# Altium PCB F407ZGT6.PcbDoc (part 6 of 7)
Units mil, origin at the board's own origin, x right, y up, seen from the top; angles counter-clockwise.
Board outline 4380 x 3940 mil, 2 copper layers (Top Layer, Bottom Layer); 88 components, 146 nets, 552 pads, 268 vias.
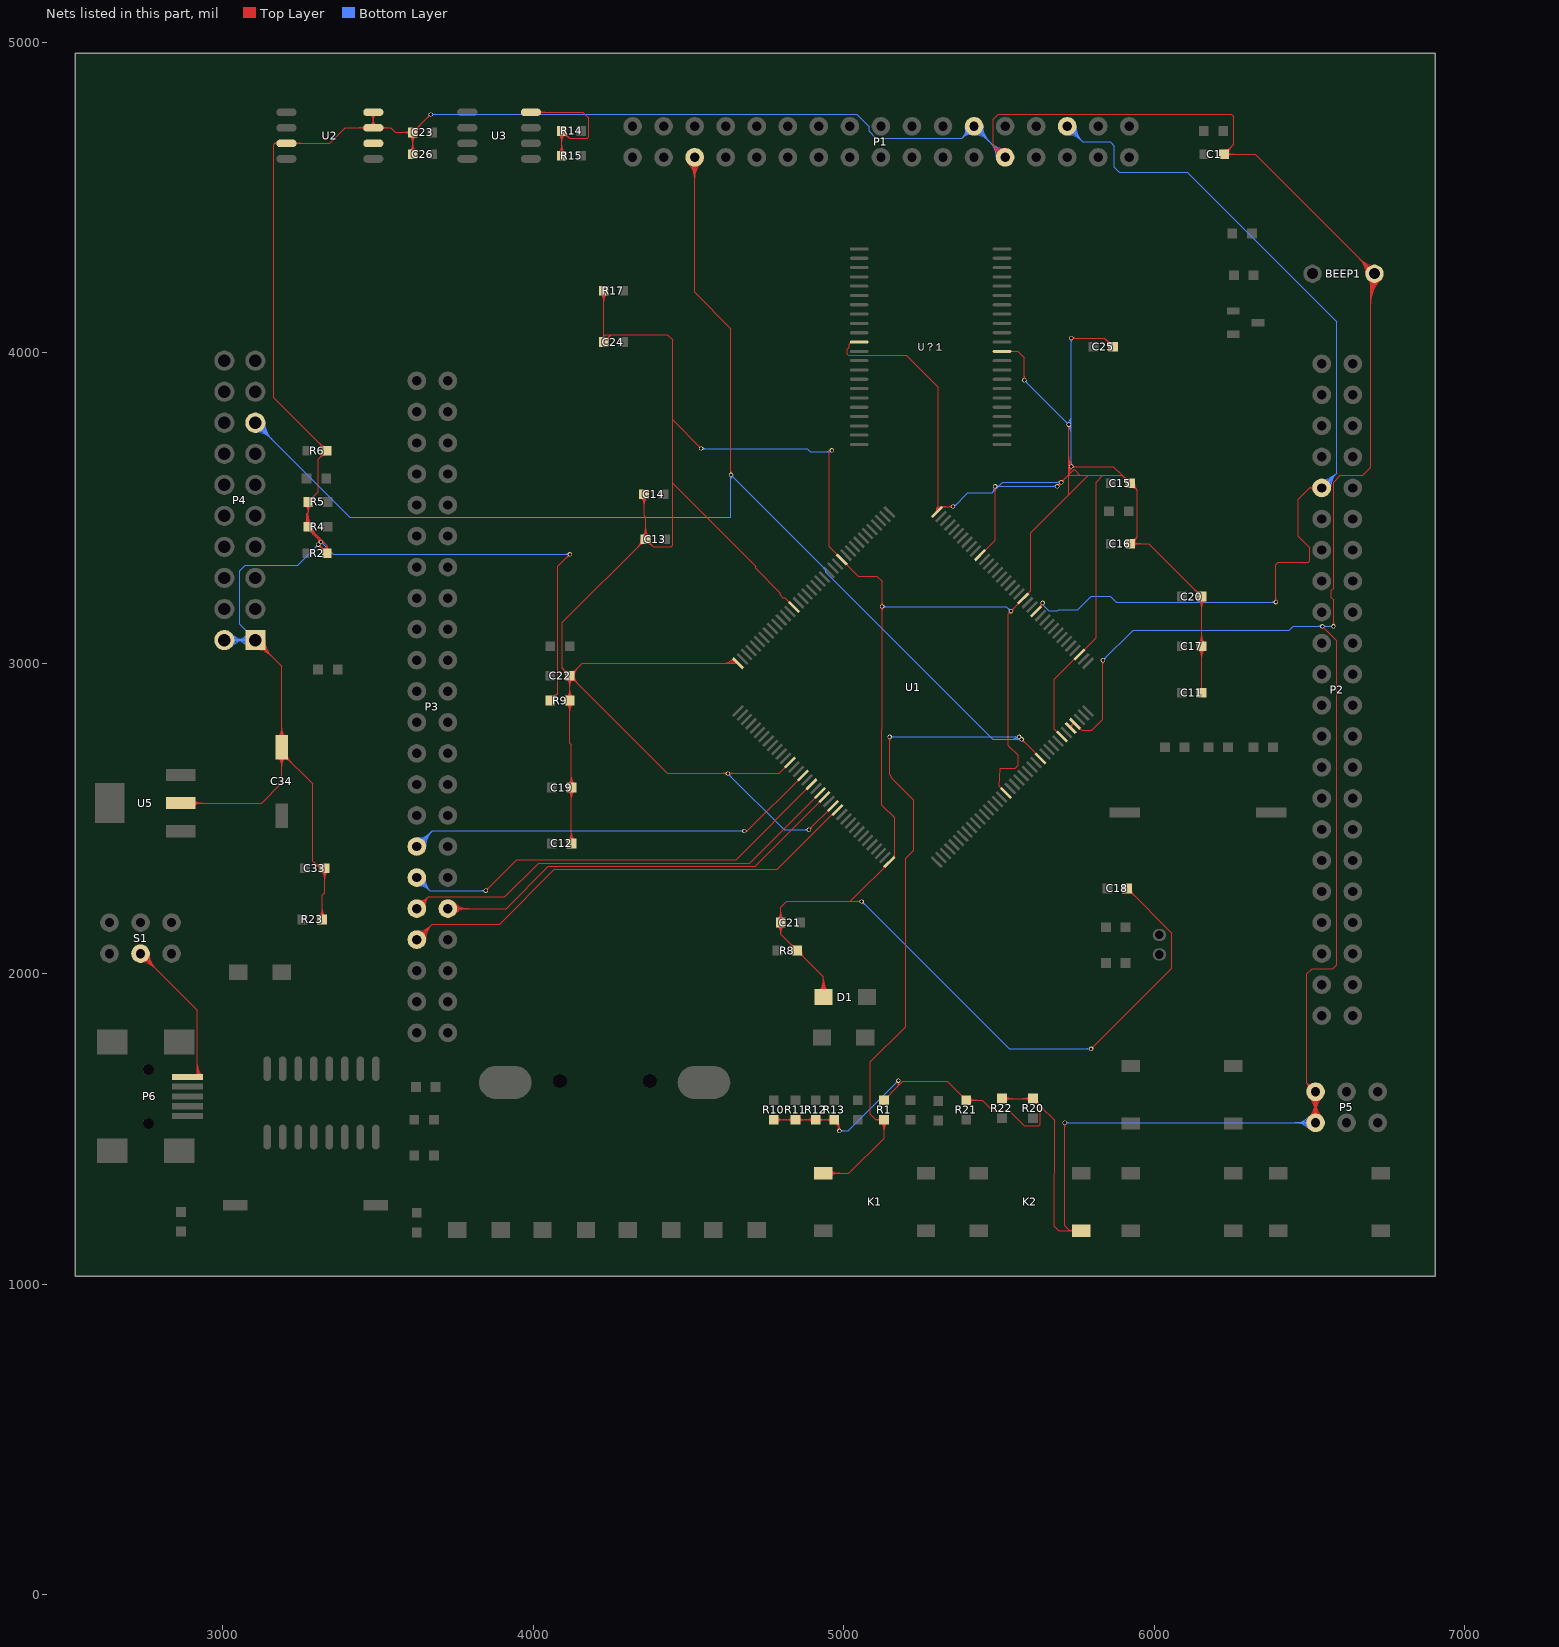
[diagram p6: the nets of this part, all layers, seen from the top]

## Via types
v1: diameter 14, hole 10, Top Layer to Bottom Layer, 265 vias
v2: diameter 150, hole 150, Top Layer to Bottom Layer, 3 vias

## Nets (pads, with @x,y where several pads share a name; then routed paths per layer and width w, separated by ;. In a path a pad name is that pad's centre, name@x,y a point inside that pad or via, vN(x,y) a via of type N, cw(c..) or ccw(c..) an arc to the next point about the centre after c; other vN are vias at no path point) (continued)
PF11: P1.30 P2.36 U1.49 | length 3898.1
  Top Layer w4: U1.49@5620.15,3167.33 5641,3188.18 v1(5641,3195) ; U1.49@5627.64,3174.82 ccw(c5607.46,3195) v1@5636,3195 ; U1.49@5633.79,3183.3 ccw(c5633.79,3188.92) 5637.77,3184.95 ccw(c5641.74,3180.97) U1.49@5636.12,3180.97 ; U1.49@5634.47,3181.65 ccw(c5621.12,3195) v1@5640,3195 ; v1@6388.46,3200.54 ccw(c6379.93,3209.07) 6392,3209.07 ccw(c6404.07,3209.07) v1@6395.54,3200.54 ; v1(6392,3197) 6392,3317 6400,3325 6496,3325 6502,3331 6502,3372 6465,3409 6465,3528 6502,3565 ; P2.36@6513.26,3556.71 ccw(c6502,3553.22) 6502,3565 ; P2.36@6513.26,3573.29 cw(c6502,3576.78) 6502,3565 ; P2.36@6517.08,3557.89 ccw(c6507.43,3554.9) 6507.43,3565 ccw(c6507.43,3575.1) P2.36@6517.08,3572.11 ; P2.36@6540,3565 6502,3565
  Bottom Layer w4: v1(5641,3195) 5641,3189 5661,3169 5690,3169 5693,3172 5754.23,3172 5798.23,3216 5859,3216 5878,3197 v1(6392,3197) ; P1.30@5720,4702 cw(c5720,4634.4) 5767.8,4682.2 cw(c5815.6,4730) P1.30@5748,4730 ; P1.30@5720,4706 cw(c5720,4648.06) 5760.97,4689.03 cw(c5801.94,4730) P1.30@5744,4730 ; P1.30@5720,4710 cw(c5720,4661.72) 5754.14,4695.86 cw(c5788.28,4730) P1.30@5740,4730 ; P1.30@5720,4714 cw(c5720,4675.37) 5747.31,4702.69 cw(c5774.63,4730) P1.30@5736,4730 ; P1.30@5720,4730 5770,4680 5858,4680 5872,4666 5872,4598 5888,4582 6106,4582 6588,4100 6588,3613 P2.36@6540,3565 ; v1@6388.46,3193.46 ccw(c6379.93,3184.93) 6379.93,3197 ccw(c6379.93,3209.07) v1@6388.46,3200.54 ; P2.36@6540,3581 ccw(c6540,3619.63) 6567.31,3592.31 ccw(c6594.63,3565) P2.36@6556,3565 ; P2.36@6540,3585 ccw(c6540,3633.28) 6574.14,3599.14 ccw(c6608.28,3565) P2.36@6560,3565 ; P2.36@6540,3589 ccw(c6540,3646.94) 6580.97,3605.97 ccw(c6621.94,3565) P2.36@6564,3565 ; P2.36@6540,3593 ccw(c6540,3660.6) 6587.8,3612.8 ccw(c6635.6,3565) P2.36@6568,3565
PG9: P3.14 U1.124 | length 1713.8
  Top Layer w4: v1(4680,2460) 4690.11,2460 ; v1@4683.97,2456.97 cw(c4690.11,2452.28) 4690.11,2460 ; v1@4683.97,2463.03 ccw(c4690.11,2467.72) 4690.11,2460 ; U1.124@4852.53,2624.75 cw(c4846.9,2624.75) 4850.88,2620.77 cw(c4854.86,2616.79) U1.124@4854.86,2622.42 ; U1.124@4868.5,2638.39 4690.11,2460
  Bottom Layer w4: P3.14@3625,2410 3675,2460 v1(4680,2460) ; P3.14@3625,2426 ccw(c3625,2464.63) 3652.31,2437.31 ccw(c3679.63,2410) P3.14@3641,2410 ; P3.14@3625,2430 ccw(c3625,2478.28) 3659.14,2444.14 ccw(c3693.28,2410) P3.14@3645,2410 ; P3.14@3625,2434 ccw(c3625,2491.94) 3665.97,2450.97 ccw(c3706.94,2410) P3.14@3649,2410 ; P3.14@3625,2438 ccw(c3625,2505.6) 3672.8,2457.8 ccw(c3720.6,2410) P3.14@3653,2410 ; v1@4676.46,2456.46 ccw(c4667.93,2447.93) 4667.93,2460 ccw(c4667.93,2472.07) v1@4676.46,2463.54
PG11: P3.12 U1.126 | length 1748.7
  Top Layer w4: v1(3847,2268) 3947,2368 4653.79,2368 U1.126@4896.34,2610.55 ; v1@3847,2273 ccw(c3847,2285.07) 3855.54,2276.54 ccw(c3864.07,2268) v1@3852,2268 ; U1.126@4880.37,2596.91 cw(c4874.74,2596.91) 4878.72,2592.93 cw(c4882.7,2588.95) U1.126@4882.7,2594.58
  Bottom Layer w4: P3.12@3625,2310 3667,2268 ; P3.12@3626.53,2294.07 cw(c3629.2,2266.2) 3649,2286 cw(c3668.8,2305.8) P3.12@3640.93,2308.47 ; P3.12@3626.91,2290.09 cw(c3630.25,2255.26) 3655,2280 cw(c3679.74,2304.75) P3.12@3644.91,2308.09 ; P3.12@3627.29,2286.11 cw(c3631.3,2244.31) 3661,2274 cw(c3690.69,2303.7) P3.12@3648.89,2307.71 ; P3.12@3627.67,2282.13 cw(c3632.35,2233.36) 3667,2268 ; P3.12@3652.87,2307.33 ccw(c3701.64,2302.65) 3667,2268 ; v1@3843.46,2264.46 ccw(c3834.93,2255.93) 3834.93,2268 ccw(c3834.93,2280.07) v1@3843.46,2271.54 ; v1(3847,2268) 3667,2268
PG13: P3.10 U1.128 | length 1673.6
  Top Layer w4: P3.10@3625,2210 3663,2248 ; P3.10@3627.79,2225.75 ccw(c3631.53,2246.89) 3646.71,2231.71 ccw(c3661.89,2216.53) P3.10@3640.75,2212.79 ; P3.10@3628.49,2229.69 ccw(c3633.17,2256.12) 3652.14,2237.14 ccw(c3671.12,2218.17) P3.10@3644.69,2213.49 ; P3.10@3629.19,2233.63 ccw(c3634.8,2265.34) 3657.57,2242.57 ccw(c3680.34,2219.8) P3.10@3648.63,2214.19 ; P3.10@3629.88,2237.57 ccw(c3636.43,2274.56) 3663,2248 ; P3.10@3652.57,2214.88 cw(c3689.56,2221.43) 3663,2248 ; 4905.76,2564.76 cw(c4910.53,2559.99) U1.128@4910.53,2566.74 ; 4906.89,2565.89 ccw(c4903.7,2569.07) U1.128@4908.2,2569.07 ; U1.128@4913,2572 4697,2356 4017,2356 3909,2248 3663,2248
PG14: P3.9 U1.129 | length 1704.3
  Top Layer w4: P3.9@3725,2210 3913,2210 4049,2346 4715.3,2346 U1.129@4938.1,2568.79 ; P3.9@3736.31,2198.69 cw(c3763.63,2171.37) 3763.63,2210 cw(c3763.63,2248.63) P3.9@3736.31,2221.31 ; P3.9@3739.14,2195.86 cw(c3773.28,2161.72) 3773.28,2210 cw(c3773.28,2258.28) P3.9@3739.14,2224.14 ; P3.9@3741.97,2193.03 cw(c3782.94,2152.06) 3782.94,2210 cw(c3782.94,2267.94) P3.9@3741.97,2226.97 ; P3.9@3744.8,2190.2 cw(c3792.6,2142.4) 3792.6,2210 cw(c3792.6,2277.6) P3.9@3744.8,2229.8 ; U1.129@4922.12,2555.15 cw(c4916.5,2555.15) 4920.48,2551.17 cw(c4924.45,2547.19) U1.129@4924.45,2552.82
PG15: P3.8 U1.132 | length 1872.3
  Top Layer w4: P3.8@3625,2110 3675,2160 3892,2160 4068,2336 4786,2336 4975,2525 4979.85,2525 U1.132@4979.85,2527.03 ; P3.8@3625,2126 ccw(c3625,2164.63) 3652.31,2137.31 ccw(c3679.63,2110) P3.8@3641,2110 ; P3.8@3625,2130 ccw(c3625,2178.28) 3659.14,2144.14 ccw(c3693.28,2110) P3.8@3645,2110 ; P3.8@3625,2134 ccw(c3625,2191.94) 3665.97,2150.97 ccw(c3706.94,2110) P3.8@3649,2110 ; P3.8@3625,2138 ccw(c3625,2205.6) 3672.8,2157.8 ccw(c3720.6,2110) P3.8@3653,2110 ; 4957.42,2507.42 cw(c4966.21,2498.62) U1.132@4966.21,2511.06
RESET: K1.1 P1.5 P4.15 R1.1 U1.25 | length 7668.9
  Top Layer w4: P1.5@4500.2,4610.2 cw(c4452.4,4562.4) 4520,4562.4 cw(c4587.6,4562.4) P1.5@4539.8,4610.2 ; P1.5@4503.03,4613.03 cw(c4462.06,4572.06) 4520,4572.06 cw(c4577.94,4572.06) P1.5@4536.97,4613.03 ; P1.5@4505.86,4615.86 cw(c4471.72,4581.72) 4520,4581.72 cw(c4568.28,4581.72) P1.5@4534.14,4615.86 ; P1.5@4508.69,4618.69 cw(c4481.37,4591.37) 4520,4591.37 cw(c4558.63,4591.37) P1.5@4531.31,4618.69 ; P1.5@4520,4630 4520,4195 4637,4078 v1(4637,3607) ; v1@4633.46,3610.54 ccw(c4624.93,3619.07) 4637,3619.07 ccw(c4649.07,3619.07) v1@4640.54,3610.54 ; K1.1@4934.65,1357.52 5016.52,1357.52 5130,1471 R1.1@5130,1530 5104,1530 ; K1.1@4951.34,1350.67 cw(c4967.87,1334.14) 4967.87,1357.52 cw(c4967.87,1380.9) K1.1@4951.34,1364.37 ; K1.1@4954.17,1347.84 cw(c4977.53,1324.48) 4977.53,1357.52 cw(c4977.53,1390.56) K1.1@4954.17,1367.2 ; K1.1@4956.99,1345.01 cw(c4987.18,1314.82) 4987.18,1357.52 cw(c4987.18,1400.22) K1.1@4956.99,1370.03 ; R1.1@5118.64,1522.26 ccw(c5104,1512.29) 5104,1530 ; R1.1@5118.64,1537.74 cw(c5104,1547.71) 5104,1530 ; R1.1@5120.28,1520.28 cw(c5096.81,1496.81) 5130,1496.81 cw(c5163.19,1496.81) R1.1@5139.72,1520.28 ; R1.1@5121.94,1524.51 ccw(c5111.57,1517.44) 5111.57,1530 ccw(c5111.57,1542.56) R1.1@5121.94,1535.49 ; R1.1@5123.11,1523.11 cw(c5106.47,1506.47) 5130,1506.47 cw(c5153.53,1506.47) R1.1@5136.89,1523.11 ; v1@5144.46,2759.46 cw(c5135.93,2750.93) 5148,2750.93 cw(c5160.07,2750.93) v1@5151.54,2759.46 ; v1(5148,2763) 5148,2640.36 5153,2635.36 5153,2632.05 5226,2559.05 5226,2397.67 5200,2371.67 5200,1830 5086,1716 5086,1548 5104,1530 ; v1@5565.37,2758.01 cw(c5565.85,2747.72) v1(5573.13,2755) ; v1@5568.14,2755.23 ccw(c5557.85,2755.72) v1(5565.13,2763) ; v1@5570.13,2762.77 ccw(c5580.41,2762.28) v1(5573.13,2755) ; v1@5572.9,2759.99 cw(c5572.41,2770.28) v1(5565.13,2763) ; v1@5573.13,2750 cw(c5573.13,2737.93) 5581.67,2746.46 cw(c5590.2,2755) v1@5578.13,2755 ; U1.25@5618.09,2707.71 ccw(c5612.47,2707.71) 5616.45,2711.69 ccw(c5620.43,2715.66) U1.25@5620.43,2710.04 ; U1.25@5634.07,2694.07 v1(5573.13,2755) ; v1(5565.13,2763) v1(5573.13,2755)
  Bottom Layer w4: P4.15@3105,3744.5 cw(c3105,3670.87) 3157.07,3722.93 cw(c3209.13,3775) P4.15@3135.5,3775 ; P4.15@3105,3748.5 cw(c3105,3684.52) 3150.24,3729.76 cw(c3195.48,3775) P4.15@3131.5,3775 ; P4.15@3105,3752.5 cw(c3105,3698.18) 3143.41,3736.59 cw(c3181.82,3775) P4.15@3127.5,3775 ; P4.15@3105,3756.5 cw(c3105,3711.84) 3136.58,3743.42 cw(c3168.16,3775) P4.15@3123.5,3775 ; P4.15@3105,3760.5 cw(c3105,3725.49) 3129.75,3750.25 cw(c3154.51,3775) P4.15@3119.5,3775 ; P4.15@3105,3775 3408.7,3471.3 4637,3471.3 v1(4637,3607) 4942.56,3301.44 4942.56,3292.67 5472.22,2763 ; v1@4633.46,3603.46 cw(c4624.93,3594.93) 4637,3594.93 cw(c4649.07,3594.93) v1@4640.54,3603.46 ; v1@4637,3602 cw(c4637,3589.93) 4645.54,3598.46 cw(c4654.07,3607) v1@4642,3607 ; v1(5148,2763) 5472.22,2763 ; v1@5151.54,2759.46 cw(c5160.07,2750.93) 5160.07,2763 cw(c5160.07,2775.07) v1@5151.54,2766.54 ; 5533.75,2755 ccw(c5533.75,2794.38) 5561.6,2766.54 cw(c5553.06,2775.07) 5553.06,2763 cw(c5553.06,2750.93) v1@5561.6,2759.46 ; 5543.4,2755 ccw(c5543.4,2784.73) v1@5564.42,2763.71 ; 5553.06,2755 ccw(c5553.06,2775.07) v1@5567.25,2760.88 ; 5562.72,2755 ccw(c5562.72,2765.41) v1@5570.08,2758.05 ; v1(5565.13,2763) 5472.22,2763 ; v1@5569.6,2751.46 ccw(c5561.06,2742.93) 5561.06,2755 ccw(c5561.06,2767.07) v1@5569.6,2758.54 ; v1(5573.13,2755) 5480.22,2755 5472.22,2763
SPI1_CLK: U2.6
V3.3: BEEP1.1 C1.1 C23.2 C26.2 C33.2 C34.1 K2.1 P1.24 P1.25 P4.1 P4.2 P5.1 P5.2 R1.2 R2.1 R4.1 R5.1 R6.1 R9.1 R10.1 R11.1 R12.1 R13.1 R20.2 R21.2 R22.2 R23.1 U1.32 U1.33 U2.3 U2.7 U2.8 U5.2 | length 25202.3
  Top Layer w4: U5.2@2864.17,2550 3125,2550 3190,2615 C34.1@3190,2711 ; U5.2@2898.58,2543.15 cw(c2915.11,2526.62) 2915.11,2550 cw(c2915.11,2573.38) U5.2@2898.58,2556.85 ; U5.2@2901.41,2540.32 cw(c2924.77,2516.96) 2924.77,2550 cw(c2924.77,2583.04) U5.2@2901.41,2559.68 ; U5.2@2904.24,2537.49 cw(c2934.43,2507.3) 2934.43,2550 cw(c2934.43,2592.7) U5.2@2904.24,2562.51 ; P4.1@3105,3044.5 cw(c3105,2970.87) 3157.07,3022.93 cw(c3209.13,3075) P4.1@3135.5,3075 ; P4.1@3105,3048.5 cw(c3105,2984.52) 3150.24,3029.76 cw(c3195.48,3075) P4.1@3131.5,3075 ; P4.1@3105,3052.5 cw(c3105,2998.18) 3143.41,3036.59 cw(c3181.82,3075) P4.1@3127.5,3075 ; P4.1@3105,3056.5 cw(c3105,3011.84) 3136.58,3043.42 cw(c3168.16,3075) P4.1@3123.5,3075 ; P4.1@3105,3060.5 cw(c3105,3025.49) 3129.75,3050.25 cw(c3154.51,3075) P4.1@3119.5,3075 ; P4.1@3105,3075 3190,2990 C34.1@3190,2730.24 C34.1@3190,2711 ; U2.3@3175.61,4670.3 ccw(c3168,4666.49) 3168,4675 ; U2.3@3175.61,4679.7 cw(c3168,4683.51) 3168,4675 ; C34.1@3177.49,2698.05 cw(c3147.3,2667.86) 3190,2667.86 cw(c3232.7,2667.86) C34.1@3202.51,2698.05 ; C34.1@3177.49,2762.43 ccw(c3147.3,2792.62) 3190,2792.62 ccw(c3232.7,2792.62) C34.1@3202.51,2762.43 ; C34.1@3180.32,2700.87 cw(c3156.96,2677.51) 3190,2677.51 cw(c3223.04,2677.51) C34.1@3199.68,2700.87 ; C34.1@3180.32,2759.6 ccw(c3156.96,2782.96) 3190,2782.96 ccw(c3223.04,2782.96) C34.1@3199.68,2759.6 ; C34.1@3183.15,2703.7 cw(c3166.62,2687.17) 3190,2687.17 cw(c3213.38,2687.17) C34.1@3196.85,2703.7 ; C34.1@3183.15,2756.77 ccw(c3166.62,2773.3) 3190,2773.3 ccw(c3213.38,2773.3) C34.1@3196.85,2756.77 ; C34.1@3190,2692.87 cw(c3190,2649.09) 3220.96,2680.04 ; C34.1@3190,2696.87 cw(c3190,2662.74) 3214.13,2686.87 ; C34.1@3190,2700.87 cw(c3190,2676.4) C34.1@3207.3,2693.7 ; C34.1@3199.68,2710.55 ccw(c3221.98,2710.55) C34.1@3206.22,2694.78 ; C34.1@3203.68,2710.55 ccw(c3235.64,2710.55) 3213.04,2687.96 ; C34.1@3207.68,2710.55 ccw(c3249.3,2710.55) 3219.87,2681.13 ; U2.3@3229.6,4670.4 cw(c3240.69,4659.31) 3240.69,4675 cw(c3240.69,4690.69) U2.3@3229.6,4679.6 ; U2.3@3232.42,4667.58 cw(c3250.35,4649.65) 3250.35,4675 cw(c3250.35,4700.35) U2.3@3232.42,4682.42 ; R5.1@3265.34,3510.22 cw(c3242.47,3487.09) 3275,3487.09 ; R4.1@3268.11,3446.89 ccw(c3251.47,3463.53) 3275,3463.53 ccw(c3298.53,3463.53) R4.1@3281.89,3446.89 ; R5.1@3268.15,3513.07 cw(c3251.94,3496.66) 3275,3496.66 cw(c3298.06,3496.66) R5.1@3281.85,3513.07 ; R4.1@3269.79,3455.37 ccw(c3288.49,3455.37) R4.1@3276.15,3441.31 ; 3269.79,3460.61 cw(c3254.39,3460.61) 3265.28,3449.72 ccw(c3241.81,3473.19) 3275,3473.19 ccw(c3308.19,3473.19) R4.1@3284.72,3449.72 ; 3269.79,3464.2 ccw(c3296.25,3464.2) R4.1@3278.79,3444.32 ; 3269.79,3473.04 ccw(c3304.01,3473.04) R4.1@3281.43,3447.33 ; R4.1@3275,3430.25 cw(c3275,3406.72) 3291.64,3423.36 cw(c3308.28,3440) 3284.75,3440 ccw(c3327.6,3440) 3297.3,3409.7 ; R5.1@3275,3529.75 ccw(c3275,3553.28) 3291.64,3536.64 ccw(c3308.28,3520) R5.1@3284.75,3520 ; R5.1@3275,3533.75 ccw(c3275,3566.94) 3298.47,3543.47 ccw(c3321.94,3520) R5.1@3288.75,3520 ; R4.1@3276.75,3440 ccw(c3300.28,3440) 3283.64,3423.36 ; R4.1@3280.75,3440 ccw(c3313.94,3440) 3290.47,3416.53 ; R4.1@3284.07,3450.33 cw(c3311.76,3481.87) 3269.79,3481.87 ; R5.1@3284.66,3510.22 ccw(c3307.53,3487.09) 3275,3487.09 ; 3284.81,3422.19 ccw(c3275,3412.38) 3275,3426.25 cw(c3275,3393.06) 3298.47,3416.53 cw(c3321.94,3440) 3288.75,3440 ccw(c3341.25,3440) 3304.13,3402.87 ; 3293.95,2358.05 ccw(c3317.28,2381.38) C33.2@3325.55,2349.44 ; 3298.9,2353.1 ccw(c3319.32,2373.52) C33.2@3326.55,2345.56 ; 3301.81,3413.19 cw(c3279.62,3391) 3311,3391 ccw(c3298.93,3391) 3307.46,3399.54 ccw(c3316,3408.07) v1@3316,3396 ; 3303.85,2348.15 ccw(c3321.35,2365.66) C33.2@3327.55,2341.69 ; v1@3306.3,3377.65 cw(c3302.27,3361.39) 3316.61,3370.03 ; v1@3307.5,3377.5 cw(c3307.5,3365.43) 3316.04,3373.96 cw(c3324.57,3382.5) v1@3312.5,3382.5 ; v1(3307.5,3382.5) R2.1@3335,3355 3335,3380 ; 3308.64,3406.36 cw(c3293.27,3391) v1@3315,3391 ; v1@3308.7,3377.65 cw(c3310.48,3370.47) 3314.29,3376.8 ; 3308.79,2343.21 ccw(c3323.39,2357.8) C33.2@3328.56,2337.82 ; R23.1@3310.28,2184.72 ccw(c3286.81,2208.19) 3320,2208.19 ccw(c3353.19,2208.19) R23.1@3329.72,2184.72 ; v1@3312.35,3381.3 ccw(c3319.53,3379.52) 3313.2,3375.71 ; v1@3312.35,3383.7 ccw(c3328.61,3387.73) 3319.97,3373.39 ; R23.1@3313.11,2181.89 ccw(c3296.47,2198.53) 3320,2198.53 ccw(c3343.53,2198.53) R23.1@3326.89,2181.89 ; C33.2@3314.4,2337.94 ccw(c3312,2337.57) 3312,2340 ; C33.2@3314.4,2342.06 cw(c3312,2342.43) 3312,2340 ; 3315.46,3399.54 cw(c3306.93,3391) v1@3319,3391 ; v1@3315.56,3393.97 cw(c3316.96,3384.48) 3323.74,3391.26 ; v1(3316,3391) 3275,3432 R4.1@3275,3440 ; v1@3316.15,3390.01 cw(c3318.4,3374.66) 3329.37,3385.63 ; v1@3316.73,3386.05 cw(c3319.84,3364.84) 3335,3380 ; C33.2@3318.27,2330.28 cw(c3294.8,2306.81) 3327.99,2306.81 cw(c3361.18,2306.81) C33.2@3337.71,2330.28 ; R23.1@3320,2175 3320,2253 3327.99,2260.99 C33.2@3327.99,2340 3312,2340 ; C33.2@3321.1,2333.11 cw(c3304.46,2316.47) 3327.99,2316.47 cw(c3351.53,2316.47) C33.2@3334.88,2333.11 ; R2.1@3321.25,3355 ccw(c3288.06,3355) 3311.53,3378.47 ccw(c3335,3401.94) R2.1@3335,3368.75 ; C33.2@3324.55,2353.31 cw(c3315.25,2389.25) 3289,2363 ; R2.1@3325.25,3355 ccw(c3301.72,3355) 3318.36,3371.64 ccw(c3335,3388.28) R2.1@3335,3364.75 ; R2.1@3327.64,3366.61 ccw(c3319.15,3380) 3335,3380 ; R2.1@3329.78,3363.23 ccw(c3323.76,3372.73) 3335,3372.73 ccw(c3346.24,3372.73) R2.1@3340.22,3363.23 ; R6.1@3335,3671.25 ccw(c3335,3638.06) 3311.53,3661.53 ccw(c3288.06,3685) 3321.25,3685 ccw(c3288.06,3685) 3311.53,3708.47 ccw(c3335,3731.94) R6.1@3335,3698.75 ; R6.1@3335,3675.25 ccw(c3335,3651.72) 3318.36,3668.36 ccw(c3301.72,3685) 3325.25,3685 ccw(c3301.72,3685) 3318.36,3701.64 ccw(c3335,3718.28) R6.1@3335,3694.75 ; R2.1@3342.36,3366.61 cw(c3350.85,3380) 3335,3380 ; U2.7@3457.58,4717.58 ccw(c3439.65,4699.65) 3439.65,4725 ccw(c3439.65,4750.35) U2.7@3457.58,4732.42 ; U2.7@3460.4,4720.4 ccw(c3449.31,4709.31) 3449.31,4725 ccw(c3449.31,4740.69) U2.7@3460.4,4729.6 ; U2.7@3477.58,4732.42 ccw(c3459.65,4750.35) 3485,4750.35 ccw(c3510.35,4750.35) U2.7@3492.42,4732.42 ; U2.8@3477.58,4767.58 cw(c3459.65,4749.65) 3485,4749.65 cw(c3510.35,4749.65) U2.8@3492.42,4767.58 ; U2.7@3480.4,4729.6 ccw(c3469.31,4740.69) 3485,4740.69 ccw(c3500.69,4740.69) U2.7@3489.6,4729.6 ; U2.8@3480.4,4770.4 cw(c3469.31,4759.31) 3485,4759.31 cw(c3500.69,4759.31) U2.8@3489.6,4770.4 ; U2.8@3485,4775 U2.7@3485,4725 ; U2.7@3509.6,4720.4 cw(c3520.69,4709.31) 3520.69,4725 cw(c3520.69,4740.69) U2.7@3509.6,4729.6 ; U2.7@3512.42,4717.58 cw(c3530.35,4699.65) 3530.35,4725 cw(c3530.35,4750.35) U2.7@3512.42,4732.42 ; C26.2@3602.29,4649.72 ccw(c3578.82,4673.19) 3612.01,4673.19 ccw(c3645.2,4673.19) C26.2@3621.73,4649.72 ; C23.2@3602.29,4719.72 cw(c3578.82,4743.19) 3578.82,4710 cw(c3578.82,4676.81) 3602.29,4700.28 cw(c3578.82,4676.81) 3612.01,4676.81 cw(c3645.2,4676.81) C23.2@3621.73,4700.28 ; C26.2@3605.12,4646.89 ccw(c3588.47,4663.53) 3612.01,4663.53 ccw(c3635.54,4663.53) C26.2@3618.9,4646.89 ; C23.2@3605.12,4716.89 cw(c3588.47,4733.53) 3588.47,4710 cw(c3588.47,4686.47) 3605.12,4703.11 cw(c3588.47,4686.47) 3612.01,4686.47 cw(c3635.54,4686.47) C23.2@3618.9,4703.11 ; C26.2@3612.01,4640 C23.2@3612.01,4710 ; C23.2@3612.01,4719.75 ccw(c3612.01,4743.28) 3628.65,4726.64 ccw(c3645.29,4710) C23.2@3621.76,4710 ; C23.2@3612.01,4723.75 ccw(c3612.01,4756.94) 3635.48,4733.47 ccw(c3658.95,4710) C23.2@3625.76,4710 ; v1@3665.01,4768 cw(c3652.94,4768) 3661.47,4759.46 cw(c3670.01,4750.93) v1@3670.01,4763 ; v1(3670.01,4768) C23.2@3612.01,4710 ; R9.1@4055,2880 4079,2904 4079,3312 v1(4118,3351) ; R9.1@4055,2889.75 ccw(c4055,2913.28) 4071.64,2896.64 ccw(c4088.28,2880) R9.1@4064.75,2880 ; R9.1@4055,2893.75 ccw(c4055,2926.94) 4078.47,2903.47 ccw(c4101.94,2880) R9.1@4068.75,2880 ; v1@4113,3351 cw(c4100.93,3351) 4109.46,3342.46 cw(c4118,3333.93) v1@4118,3346 ; R10.1@4775,1530 R11.1@4845,1530 R12.1@4910,1530 R13.1@4970,1530 4986,1514 ; R10.1@4781.89,1523.11 cw(c4798.53,1506.47) 4798.53,1530 cw(c4798.53,1553.53) R10.1@4781.89,1536.89 ; R10.1@4784.72,1520.28 cw(c4808.19,1496.81) 4808.19,1530 cw(c4808.19,1563.19) R10.1@4784.72,1539.72 ; R11.1@4835.28,1520.28 ccw(c4811.81,1496.81) 4811.81,1530 ccw(c4811.81,1563.19) R11.1@4835.28,1539.72 ; R11.1@4838.11,1523.11 ccw(c4821.47,1506.47) 4821.47,1530 ccw(c4821.47,1553.53) R11.1@4838.11,1536.89 ; R11.1@4851.89,1523.11 cw(c4868.53,1506.47) 4868.53,1530 cw(c4868.53,1553.53) R11.1@4851.89,1536.89 ; R11.1@4854.72,1520.28 cw(c4878.19,1496.81) 4878.19,1530 cw(c4878.19,1563.19) R11.1@4854.72,1539.72 ; R12.1@4900.28,1520.28 ccw(c4876.81,1496.81) 4876.81,1530 ccw(c4876.81,1563.19) R12.1@4900.28,1539.72 ; R12.1@4903.11,1523.11 ccw(c4886.47,1506.47) 4886.47,1530 ccw(c4886.47,1553.53) R12.1@4903.11,1536.89 ; R12.1@4916.89,1523.11 cw(c4933.53,1506.47) 4933.53,1530 cw(c4933.53,1553.53) R12.1@4916.89,1536.89 ; R12.1@4919.72,1520.28 cw(c4943.19,1496.81) 4943.19,1530 cw(c4943.19,1563.19) R12.1@4919.72,1539.72 ; R13.1@4960.28,1520.28 ccw(c4936.81,1496.81) 4936.81,1530 ccw(c4936.81,1563.19) R13.1@4960.28,1539.72 ; R13.1@4963.11,1523.11 ccw(c4946.47,1506.47) 4946.47,1530 ccw(c4946.47,1553.53) R13.1@4963.11,1536.89 ; R13.1@4967.33,1520.62 cw(c4960.3,1495.9) v1@4986,1495.9 ; R13.1@4968.43,1524.47 cw(c4961.8,1501.2) 4986,1501.2 ; R13.1@4969.52,1528.32 cw(c4963.31,1506.5) 4986,1506.5 ; R13.1@4970.62,1532.17 cw(c4964.82,1511.79) 4986,1511.79 ; R13.1@4972.94,1520.71 cw(c4975.46,1512.77) 4981.34,1518.66 cw(c4987.23,1524.54) R13.1@4979.29,1527.06 ; R13.1@4974.15,1516.89 cw(c4977.69,1505.7) 4986,1514 ; v1@4981.67,1496.5 ccw(c4969.76,1503.38) 4983.04,1506.94 ; v1@4982.46,1497.54 ccw(c4973.93,1506.07) 4986,1506.07 ccw(c4998.07,1506.07) v1@4989.54,1497.54 ; R13.1@4983.11,1525.85 ccw(c4994.3,1522.31) 4986,1514 ; 4983.66,1504.64 ccw(c4993.69,1507.33) v1@4988.5,1498.33 ; v1(4986,1494) 4986,1514 ; R1.2@5130,1592.99 5176,1638.99 ; v1@5172.46,1652.46 cw(c5163.93,1643.93) 5176,1643.93 cw(c5188.07,1643.93) v1@5179.54,1652.46 ; v1(5176,1656) 5176,1638.99 ; R21.2@5401.89,1586.1 cw(c5418.53,1569.46) 5418.53,1592.99 cw(c5418.53,1616.53) R21.2@5401.89,1599.88 ; R21.2@5404.72,1583.27 cw(c5428.19,1559.8) 5428.19,1592.99 cw(c5428.19,1626.18) R21.2@5404.72,1602.71 ; P1.25@5492.43,4634.88 ccw(c5455.44,4641.43) 5482,4668 ; P1.25@5496.37,4634.19 ccw(c5464.66,4639.8) 5487.43,4662.57 ccw(c5510.2,4685.34) P1.25@5515.81,4653.63 ; P1.25@5500.31,4633.49 ccw(c5473.88,4638.17) 5492.86,4657.14 ccw(c5511.83,4676.12) P1.25@5516.51,4649.69 ; P1.25@5504.25,4632.79 ccw(c5483.11,4636.53) 5498.29,4651.71 ccw(c5513.47,4666.89) P1.25@5517.21,4645.75 ; R22.2@5510,1597.99 R20.2@5610,1597.99 5634,1573.99 ; P1.25@5515.12,4657.57 cw(c5508.57,4694.56) 5482,4668 ; R22.2@5516.89,1591.1 cw(c5533.53,1574.46) 5533.53,1597.99 cw(c5533.53,1621.53) R22.2@5516.89,1604.88 ; R22.2@5519.72,1588.27 cw(c5543.19,1564.8) 5543.19,1597.99 cw(c5543.19,1631.18) R22.2@5519.72,1607.71 ; P1.25@5520,4630 5482,4668 ; R20.2@5600.28,1588.27 ccw(c5576.81,1564.8) 5576.81,1597.99 ccw(c5576.81,1631.18) R20.2@5600.28,1607.71 ; R20.2@5603.11,1591.1 ccw(c5586.47,1574.46) 5586.47,1597.99 ccw(c5586.47,1621.53) R20.2@5603.11,1604.88 ; R20.2@5610,1584.24 cw(c5610,1551.05) 5633.47,1574.52 cw(c5656.94,1597.99) R20.2@5623.75,1597.99 ; R20.2@5610,1588.24 cw(c5610,1564.71) 5626.64,1581.35 cw(c5643.28,1597.99) R20.2@5619.75,1597.99 ; v1@5708.46,1516.46 cw(c5699.93,1507.93) 5712,1507.93 cw(c5724.07,1507.93) v1@5715.54,1516.46 ; v1(5712,1520) 5712,1188.48 5728,1172.48 ; U1.32@5729.85,2791.29 cw(c5739.8,2792.57) 5732.7,2799.66 ; U1.32@5729.85,2793.15 ccw(c5725.88,2797.13) 5731.5,2797.13 ccw(c5737.13,2797.13) U1.32@5733.15,2793.15 ; U1.32@5731.5,2791.5 5731.5,2798.46 ; U1.32@5733.81,2791.8 cw(c5750,2793.88) 5738.46,2805.42 ; 5737.26,2804.22 cw(c5744.35,2797.13) U1.33@5745.63,2807.08 ; K2.1@5739.42,1165.14 ccw(c5728,1159.93) 5728,1172.48 ; K2.1@5739.42,1179.82 cw(c5728,1185.03) 5728,1172.48 ; K2.1@5743.06,1166.8 ccw(c5734.22,1162.77) 5734.22,1172.48 ccw(c5734.22,1182.19) K2.1@5743.06,1178.16 ; U1.33@5743.77,2803.77 ccw(c5739.79,2799.79) 5739.79,2805.42 ccw(c5739.79,2811.05) U1.33@5743.77,2807.07 ; U1.33@5745.12,2803.11 ccw(c5743.04,2786.92) 5731.5,2798.46 ; U1.33@5759.06,2789.45 cw(c5759.06,2783.82) 5763.04,2787.8 cw(c5767.02,2791.78) U1.33@5761.39,2791.78 ; K2.1@5765.35,1172.48 5728,1172.48 ; v1@5831.46,3006.46 cw(c5822.93,2997.93) 5835,2997.93 cw(c5847.07,2997.93) v1@5838.54,3006.46 ; v1(5835,3010) 5835,2820.47 5798.53,2784 5766.84,2784 U1.33@5745.42,2805.42 5738.46,2805.42 ; C1.1@6225,4649.75 ccw(c6225,4673.28) 6241.64,4656.64 ccw(c6258.28,4640) C1.1@6234.75,4640 ; C1.1@6225,4653.75 ccw(c6225,4686.94) 6248.47,4663.47 ccw(c6271.94,4640) C1.1@6238.75,4640 ; C1.1@6231.89,4633.11 cw(c6248.53,4616.47) 6248.53,4640 cw(c6248.53,4663.53) C1.1@6231.89,4646.89 ; C1.1@6234.72,4630.28 cw(c6258.19,4606.81) 6258.19,4640 cw(c6258.19,4673.19) C1.1@6234.72,4649.72 ; P5.2@6494.73,1632.07 ccw(c6482.1,1638.1) 6492,1648 ; P5.2@6498.34,1630.34 ccw(c6487.52,1635.52) 6496,1644 ccw(c6504.48,1652.48) P5.2@6509.66,1641.66 ; P5.1@6500.2,1539.8 ccw(c6452.4,1587.6) 6520,1587.6 ccw(c6587.6,1587.6) P5.1@6539.8,1539.8 ; P5.2@6500.2,1600.2 cw(c6452.4,1552.4) 6520,1552.4 cw(c6587.6,1552.4) P5.2@6539.8,1600.2 ; P5.1@6503.03,1536.97 ccw(c6462.06,1577.94) 6520,1577.94 ccw(c6577.94,1577.94) P5.1@6536.97,1536.97 ; P5.2@6503.03,1603.03 cw(c6462.06,1562.06) 6520,1562.06 cw(c6577.94,1562.06) P5.2@6536.97,1603.03 ; P5.1@6505.86,1534.14 ccw(c6471.72,1568.28) 6520,1568.28 ccw(c6568.28,1568.28) P5.1@6534.14,1534.14 ; P5.2@6505.86,1605.86 cw(c6471.72,1571.72) 6520,1571.72 cw(c6568.28,1571.72) P5.2@6534.14,1605.86 ; P5.2@6507.93,1645.27 cw(c6501.9,1657.9) 6492,1648 ; P5.1@6508.69,1531.31 ccw(c6481.37,1558.63) 6520,1558.63 ccw(c6558.63,1558.63) P5.1@6531.31,1531.31 ; P5.2@6508.69,1608.69 cw(c6481.37,1581.37) 6520,1581.37 cw(c6558.63,1581.37) P5.2@6531.31,1608.69 ; P5.1@6520,1520 P5.2@6520,1620 6492,1648 ; v1@6542,3114 cw(c6542,3101.93) 6550.54,3110.46 cw(c6559.07,3119) v1@6547,3119 ; v1(6542,3119) 6588,3073 6588,2029 6576,2017 6509,2017 6492,2000 6492,1648 ; v1@6574.46,3122.54 ccw(c6565.93,3131.07) 6578,3131.07 ccw(c6590.07,3131.07) v1@6581.54,3122.54 ; v1(6578,3119) 6578,3205 6571,3212 6571,3235 6578,3242 6578,3584 6599.9,3605.9 6671.9,3605.9 6698,3632 6698,4243 BEEP1.1@6710,4255 6325,4640 C1.1@6225,4640 6256.74,4671.74 6256.74,4760.22 6248.96,4768 5498,4768 5482,4752 5482,4668 ; BEEP1.1@6682.47,4255 ccw(c6616.02,4255) 6663.01,4301.99 ccw(c6710,4348.98) BEEP1.1@6710,4282.53 ; BEEP1.1@6686.47,4255 ccw(c6629.67,4255) 6669.84,4295.16 ccw(c6710,4335.33) BEEP1.1@6710,4278.53 ; BEEP1.1@6690.47,4255 ccw(c6643.33,4255) 6676.66,4288.34 ccw(c6710,4321.67) BEEP1.1@6710,4274.53 ; BEEP1.1@6690.54,4235.54 cw(c6672.51,4217.51) 6698,4217.51 cw(c6747.49,4217.51) BEEP1.1@6712.49,4252.51 ; BEEP1.1@6693.36,4238.36 cw(c6682.17,4227.17) 6698,4227.17 cw(c6737.83,4227.17) BEEP1.1@6709.67,4255.33 ; BEEP1.1@6694.47,4255 ccw(c6656.99,4255) 6683.49,4281.51 ccw(c6710,4308.01) BEEP1.1@6710,4270.53 ; 6698,4159.57 cw(c6805.43,4159.57) BEEP1.1@6729.46,4235.54 ; 6698,4169.23 cw(c6795.77,4169.23) BEEP1.1@6726.64,4238.36 ; 6698,4178.89 cw(c6786.11,4178.89) BEEP1.1@6723.81,4241.19 ; 6698,4188.54 cw(c6776.46,4188.54) BEEP1.1@6720.98,4244.02 ; 6698,4198.2 cw(c6766.8,4198.2) BEEP1.1@6718.15,4246.85 ; 6698,4207.86 cw(c6757.14,4207.86) BEEP1.1@6715.32,4249.68 ; 3168,4675 3164,4671 3164,3856 R6.1@3335,3685 3308,3658 3308,3553 R5.1@3275,3520 3275,3487.08 ; 3168,4675 U2.3@3205,4675 3345,4675 3395,4725 U2.7@3485,4725 ; C34.1@3190,2711 3289,2612 3289,2363 ; 3269.79,3481.87 3269.79,3445.21 R4.1@3275,3440 ; 3269.79,3481.87 3275,3487.08 ; R4.1@3275,3440 3275,3487.08 ; R4.1@3275,3440 3335,3380 ; 3289,2363 3312,2340 ; U2.7@3485,4725 3541,4725 3556,4710 C23.2@3612.01,4710 ; 5176,1638.99 5191.01,1654 5333.99,1654 R21.2@5395,1592.99 5447.01,1592.99 5481,1559 5534,1559 5582,1511 5629,1511 5634,1516 5634,1573.99 ; 5634,1573.99 5680,1527.99 5678.76,1187.24 5693.52,1172.48 5728,1172.48 ; 5731.5,2798.46 5738.46,2805.42
  Bottom Layer w4: P4.2@3005,3075 P4.1@3105,3075 3054,3126 3054,3298 3072,3316 3241,3316 v1(3307.5,3382.5) ; P4.2@3015.25,3064.75 cw(c3040.01,3039.99) 3040.01,3075 cw(c3040.01,3110.01) P4.2@3015.25,3085.25 ; P4.2@3018.08,3061.92 cw(c3049.66,3030.34) 3049.66,3075 cw(c3049.66,3119.66) P4.2@3018.08,3088.08 ; P4.2@3020.91,3059.09 cw(c3059.32,3020.68) 3059.32,3075 cw(c3059.32,3129.32) P4.2@3020.91,3090.91 ; P4.2@3023.74,3056.26 cw(c3068.98,3011.02) 3068.98,3075 cw(c3068.98,3138.98) P4.2@3023.74,3093.74 ; P4.2@3026.57,3053.43 cw(c3078.63,3001.37) 3078.63,3075 cw(c3078.63,3148.63) P4.2@3026.57,3096.57 ; P4.1@3083.43,3053.43 ccw(c3031.37,3001.37) 3031.37,3075 ccw(c3031.37,3148.63) P4.1@3083.43,3096.57 ; P4.1@3086.26,3056.26 ccw(c3041.02,3011.02) 3041.02,3075 ccw(c3041.02,3138.98) P4.1@3086.26,3093.74 ; P4.1@3089.09,3059.09 ccw(c3050.68,3020.68) 3050.68,3075 ccw(c3050.68,3129.32) P4.1@3089.09,3090.91 ; P4.1@3091.92,3061.92 ccw(c3060.34,3030.34) 3060.34,3075 ccw(c3060.34,3119.66) P4.1@3091.92,3088.08 ; P4.1@3094.75,3064.75 ccw(c3069.99,3039.99) 3069.99,3075 ccw(c3069.99,3110.01) P4.1@3094.75,3085.25 ; v1@3302.5,3382.5 cw(c3290.43,3382.5) 3298.96,3373.96 cw(c3307.5,3365.43) v1@3307.5,3377.5 ; v1@3316,3386 cw(c3316,3373.93) 3324.54,3382.46 cw(c3333.07,3391) v1@3321,3391 ; v1(3316,3391) 3356,3351 v1(4118,3351) ; v1(3670.01,4768) 5042,4768 5082,4728 5082,4714 5104,4692 5382,4692 ; v1@3673.54,4764.46 cw(c3682.08,4755.93) 3682.08,4768 cw(c3682.08,4780.07) v1@3673.54,4771.54 ; v1@4114.46,3347.46 ccw(c4105.93,3338.93) 4105.93,3351 ccw(c4105.93,3363.07) v1@4114.46,3354.54 ; v1(4986,1494) 5014,1494 v1(5176,1656) ; v1@4989.54,1490.46 cw(c4998.07,1481.93) 4998.07,1494 cw(c4998.07,1506.07) v1@4989.54,1497.54 ; v1@5171,1656 cw(c5158.93,1656) 5167.46,1647.46 cw(c5176,1638.93) v1@5176,1651 ; P1.24@5392.43,4725.12 cw(c5355.44,4718.57) 5382,4692 ; P1.24@5396.37,4725.81 cw(c5364.66,4720.2) 5387.43,4697.43 cw(c5410.2,4674.66) P1.24@5415.81,4706.37 ; P1.24@5400.31,4726.51 cw(c5373.88,4721.83) 5392.86,4702.86 cw(c5411.83,4683.88) P1.24@5416.51,4710.31 ; P1.24@5404.25,4727.21 cw(c5383.11,4723.47) 5398.29,4708.29 cw(c5413.47,4693.11) P1.24@5417.21,4714.25 ; P1.24@5415.12,4702.43 ccw(c5408.57,4665.44) 5382,4692 ; P1.24@5420,4702 cw(c5420,4634.4) 5467.8,4682.2 cw(c5515.6,4730) P1.24@5448,4730 ; P1.24@5420,4706 cw(c5420,4648.06) 5460.97,4689.03 cw(c5501.94,4730) P1.24@5444,4730 ; P1.24@5420,4710 cw(c5420,4661.72) 5454.14,4695.86 cw(c5488.28,4730) P1.24@5440,4730 ; P1.24@5420,4714 cw(c5420,4675.37) 5447.31,4702.69 cw(c5474.63,4730) P1.24@5436,4730 ; P1.25@5492,4630 ccw(c5424.4,4630) 5472.2,4677.8 ccw(c5520,4725.6) P1.25@5520,4658 ; P1.25@5496,4630 ccw(c5438.06,4630) 5479.03,4670.97 ccw(c5520,4711.94) P1.25@5520,4654 ; P1.25@5500,4630 ccw(c5451.72,4630) 5485.86,4664.14 ccw(c5520,4698.28) P1.25@5520,4650 ; P1.25@5504,4630 ccw(c5465.37,4630) 5492.69,4657.31 ccw(c5520,4684.63) P1.25@5520,4646 ; P1.25@5520,4630 P1.24@5420,4730 5382,4692 ; v1(5712,1520) P5.1@6520,1520 ; v1@5715.54,1516.46 cw(c5724.07,1507.93) 5724.07,1520 cw(c5724.07,1532.07) v1@5715.54,1523.54 ; v1(5835,3010) 5932,3107 6436,3107 6448,3119 v1(6542,3119) v1(6578,3119) ; v1@5835,3015 ccw(c5835,3027.07) 5843.54,3018.54 ccw(c5852.07,3010) v1@5840,3010 ; P5.1@6500.2,1500.2 ccw(c6452.4,1452.4) 6452.4,1520 ccw(c6452.4,1587.6) P5.1@6500.2,1539.8 ; P5.1@6503.03,1503.03 ccw(c6462.06,1462.06) 6462.06,1520 ccw(c6462.06,1577.94) P5.1@6503.03,1536.97 ; P5.1@6505.86,1505.86 ccw(c6471.72,1471.72) 6471.72,1520 ccw(c6471.72,1568.28) P5.1@6505.86,1534.14 ; P5.1@6508.69,1508.69 ccw(c6481.37,1481.37) 6481.37,1520 ccw(c6481.37,1558.63) P5.1@6508.69,1531.31 ; v1@6538.46,3115.46 ccw(c6529.93,3106.93) 6529.93,3119 ccw(c6529.93,3131.07) v1@6538.46,3122.54 ; v1@6545.54,3115.46 cw(c6554.07,3106.93) 6554.07,3119 cw(c6554.07,3131.07) v1@6545.54,3122.54 ; v1@6574.46,3115.46 ccw(c6565.93,3106.93) 6565.93,3119 ccw(c6565.93,3131.07) v1@6574.46,3122.54
V3.3M: C11.2 C12.2 C13.2 C14.2 C15.2 C16.2 C17.2 C18.2 C19.2 C20.2 C21.2 C22.2 C24.2 C25.2 D1.1 R8.1 R9.2 R17.2 U1.17 U1.30 U1.39 U1.52 U1.62 U1.72 U1.84 U1.95 U1.108 U1.121 U1.131 U1.144 U？1.11 U？1.33 | length 20289.9
  Top Layer w4: C22.2@4104.24,2960 ccw(c4071.05,2960) 4094.52,2983.47 ccw(c4117.99,3006.94) 4117.99,2973.75 ccw(c4117.99,3006.94) 4141.46,2983.47 ccw(c4164.93,2960) 4131.74,2960 ccw(c4164.93,2960) 4141.46,2936.53 ccw(c4117.99,2913.06) C22.2@4117.99,2946.25 ; R9.2@4108.27,2870.28 cw(c4084.8,2846.81) 4117.99,2846.81 cw(c4151.18,2846.81) R9.2@4127.71,2870.28 ; R9.2@4108.27,2889.72 ccw(c4084.8,2913.19) 4117.99,2913.19 ccw(c4151.18,2913.19) R9.2@4127.71,2889.72 ; C22.2@4108.27,2950.28 cw(c4084.8,2926.81) 4117.99,2926.81 cw(c4151.18,2926.81) C22.2@4127.71,2950.28 ; C22.2@4108.24,2960 ccw(c4084.71,2960) 4101.35,2976.64 ccw(c4117.99,2993.28) 4117.99,2969.75 ccw(c4117.99,2993.28) 4134.63,2976.64 ccw(c4151.27,2960) 4127.74,2960 ccw(c4151.27,2960) 4134.63,2943.36 ccw(c4117.99,2926.72) C22.2@4117.99,2950.25 ; R9.2@4111.1,2873.11 cw(c4094.46,2856.47) 4117.99,2856.47 cw(c4141.53,2856.47) R9.2@4124.88,2873.11 ; R9.2@4111.1,2886.89 ccw(c4094.46,2903.53) 4117.99,2903.53 ccw(c4141.53,2903.53) R9.2@4124.88,2886.89 ; C22.2@4111.1,2953.11 cw(c4094.46,2936.47) 4117.99,2936.47 cw(c4141.53,2936.47) C22.2@4124.88,2953.11 ; C12.2@4113.27,2429.72 ccw(c4089.8,2453.19) 4122.99,2453.19 ccw(c4156.18,2453.19) C12.2@4132.71,2429.72 ; C19.2@4113.27,2590.28 cw(c4089.8,2566.81) 4122.99,2566.81 cw(c4156.18,2566.81) C19.2@4132.71,2590.28 ; C19.2@4113.27,2609.72 ccw(c4089.8,2633.19) 4122.99,2633.19 ccw(c4156.18,2633.19) C19.2@4132.71,2609.72 ; C12.2@4116.1,2426.89 ccw(c4099.46,2443.53) 4122.99,2443.53 ccw(c4146.53,2443.53) C12.2@4129.88,2426.89 ; C19.2@4116.1,2593.11 cw(c4099.46,2576.47) 4122.99,2576.47 cw(c4146.53,2576.47) C19.2@4129.88,2593.11 ; C19.2@4116.1,2606.89 ccw(c4099.46,2623.53) 4122.99,2623.53 ccw(c4146.53,2623.53) C19.2@4129.88,2606.89 ; C12.2@4122.99,2420 C19.2@4122.99,2600 4122.99,2737 4117.99,2742 R9.2@4117.99,2880 C22.2@4117.99,2960 ; R17.2@4217.29,4190.28 cw(c4193.82,4166.81) 4227.01,4166.81 cw(c4260.2,4166.81) R17.2@4236.73,4190.28 ; R17.2@4220.12,4193.11 cw(c4203.47,4176.47) 4227.01,4176.47 cw(c4250.54,4176.47) R17.2@4233.9,4193.11 ; C24.2@4222.7,4048.06 ccw(c4220.74,4054.01) 4227.01,4054.01 ; C24.2@4227.01,4044.75 ccw(c4227.01,4068.28) 4243.65,4051.64 ccw(c4260.29,4035) C24.2@4236.76,4035 ; C24.2@4227.01,4048.75 ccw(c4227.01,4081.94) 4250.48,4058.47 ccw(c4273.95,4035) C24.2@4240.76,4035 ; R17.2@4227.01,4200 4227.01,4054.01 ; C24.2@4231.31,4048.06 cw(c4233.27,4054.01) 4227.01,4054.01 ; C14.2@4347.29,3535.28 cw(c4323.82,3511.81) 4357.01,3511.81 cw(c4390.2,3511.81) C14.2@4366.73,3535.28 ; C13.2@4348.26,3400 cw(c4315.07,3400) 4338.54,3376.53 cw(c4362.01,3353.06) 4362.01,3386.25 cw(c4362.01,3353.06) 4385.48,3376.53 cw(c4408.95,3400) C13.2@4375.76,3400 ; C14.2@4350.12,3538.11 cw(c4333.47,3521.47) 4357.01,3521.47 cw(c4380.54,3521.47) C14.2@4363.9,3538.11 ; C13.2@4352.26,3400 cw(c4328.73,3400) 4345.37,3383.36 cw(c4362.01,3366.72) 4362.01,3390.25 cw(c4362.01,3366.72) 4378.65,3383.36 cw(c4395.29,3400) C13.2@4371.76,3400 ; C13.2@4352.29,3409.72 ccw(c4328.82,3433.19) 4362.01,3433.19 ccw(c4395.2,3433.19) C13.2@4371.73,3409.72 ; C13.2@4355.12,3406.89 ccw(c4338.47,3423.53) 4362.01,3423.53 ccw(c4385.54,3423.53) C13.2@4368.9,3406.89 ; C14.2@4357.01,3545 4357.01,3475 4362.01,3470 C13.2@4362.01,3400 ; v1@4536,3692 ccw(c4523.93,3692) 4532.46,3700.54 ccw(c4541,3709.07) v1@4541,3697 ; v1(4541,3692) 4449,3784 ; 4607.51,3000.29 ccw(c4607.51,3052.49) U1.108@4644.42,3015.58 ; 4612.51,2646 cw(c4612.51,2630.51) v1@4623.46,2641.46 ; 4617.16,3000.29 ccw(c4617.16,3042.84) U1.108@4647.25,3012.75 ; 4617.34,2646 ccw(c4617.34,2654.66) v1@4623.46,2648.54 ; 4626.82,3000.29 ccw(c4626.82,3033.18) U1.108@4650.08,3009.92 ; v1@4630.54,2641.46 cw(c4641.49,2630.51) 4641.49,2646 ; v1@4630.54,2648.54 ccw(c4636.66,2654.66) 4636.66,2646 ; 4636.48,3000.29 ccw(c4636.48,3023.52) U1.108@4652.9,3007.1 ; 4646.14,3000.29 ccw(c4646.14,3013.86) U1.108@4655.73,3004.27 ; U1.108@4655.79,3000.29 ccw(c4655.79,3004.21) U1.108@4658.56,3001.44 ; U1.108@4659.71,3000.29 4158.28,3000.29 C22.2@4117.99,2960 ; C21.2@4787.29,2155.28 cw(c4763.82,2131.81) 4797.01,2131.81 cw(c4830.2,2131.81) C21.2@4806.73,2155.28 ; C21.2@4787.29,2174.72 ccw(c4763.82,2198.19) 4797.01,2198.19 ccw(c4830.2,2198.19) C21.2@4806.73,2174.72 ; C21.2@4790.12,2158.11 cw(c4773.47,2141.47) 4797.01,2141.47 cw(c4820.54,2141.47) C21.2@4803.9,2158.11 ; C21.2@4790.12,2171.89 ccw(c4773.47,2188.53) 4797.01,2188.53 ccw(c4820.54,2188.53) C21.2@4803.9,2171.89 ; U1.121@4810.77,2666.51 cw(c4805.14,2666.51) 4809.12,2662.53 cw(c4813.1,2658.55) U1.121@4813.1,2664.17 ; U1.95@4824.69,3194.89 ccw(c4819.06,3194.89) 4823.04,3198.86 ccw(c4827.02,3202.84) U1.95@4827.02,3197.22 ; U1.121@4826.74,2680.15 4792.59,2646 4431.99,2646 C22.2@4117.99,2960 ; R8.1@4836.25,2075 ccw(c4803.06,2075) 4826.53,2098.47 ccw(c4850,2121.94) R8.1@4850,2088.75 ; R8.1@4840.25,2075 ccw(c4816.72,2075) 4833.36,2091.64 ccw(c4850,2108.28) R8.1@4850,2084.75 ; U1.95@4840.66,3181.24 4809.9,3212 4804.37,3212 4795.58,3220.79 4795.58,3226.32 4716.03,3305.87 4716.03,3312.64 4449,3579.67 ; R8.1@4850,2061.25 cw(c4850,2028.06) 4873.47,2051.53 cw(c4896.94,2075) R8.1@4863.75,2075 ; R8.1@4850,2065.25 cw(c4850,2041.72) 4866.64,2058.36 cw(c4883.28,2075) R8.1@4859.75,2075 ; v1(4888,2464) U1.131@4965.93,2540.95 ; v1@4888.03,2469 ccw(c4888.11,2481.07) 4896.59,2472.48 ccw(c4905.07,2463.89) v1@4893,2463.97 ; D1.1@4918.32,1941.68 ccw(c4878.05,1981.95) 4935,1981.95 ccw(c4991.95,1981.95) D1.1@4951.68,1941.68 ; D1.1@4921.15,1938.85 ccw(c4887.7,1972.3) 4935,1972.3 ccw(c4982.3,1972.3) D1.1@4948.85,1938.85 ; D1.1@4923.98,1936.02 ccw(c4897.36,1962.64) 4935,1962.64 ccw(c4972.64,1962.64) D1.1@4946.02,1936.02 ; D1.1@4926.8,1933.2 ccw(c4907.02,1952.98) 4935,1952.98 ccw(c4962.98,1952.98) D1.1@4943.2,1933.2 ; D1.1@4935,1925 4935,1990 R8.1@4850,2075 4797.01,2127.99 C21.2@4797.01,2165 4797.01,2214.01 4816,2233 v1(5058,2233) ; 4947.99,2523.24 cw(c4952.24,2518.94) U1.131@4952.28,2524.98 ; 4948.41,2523.65 ccw(c4944.75,2527.36) U1.131@4949.96,2527.33 ; 4954.88,3680.88 ccw(c4949.76,3686) v1@4957,3686 ; v1@4960.78,3681.15 ccw(c4958.79,3673.21) 4953,3679 ; v1(4962,3686) 4960,3686 4953,3679 ; 4975.54,3353.46 cw(c4970.08,3348) U1.84@4977.8,3348 ; U1.84@5007.41,3318.39 cw(c5007.41,3312.76) 5011.39,3316.74 cw(c5015.37,3320.72) U1.84@5009.75,3320.72 ; 5021,2233 5164,2376 5164,2501.93 5123,2542.93 5123,2788 5124,2789 v1(5124,3183) 5124,3264 5107,3281 5047.13,3281 U1.84@4993.77,3334.36 4993.77,3335.23 4953,3376 4953,3679 ; U？1.11@5022,4035 cw(c5014.76,4035) 5019.88,4029.88 cw(c5025,4024.76) U？1.11@5025,4032 ; U？1.11@5050,4035 5025,4035 5017.44,4027.44 5017.44,4017.65 5012,4012.21 5012,3996 5016,3992 5200.87,3992 5304,3888.87 5304,3505 ; v1@5054.46,2229.46 ccw(c5045.93,2220.93) 5045.93,2233 ccw(c5045.93,2245.07) v1@5054.46,2236.54 ; v1@5120.46,3179.46 cw(c5111.93,3170.93) 5124,3170.93 cw(c5136.07,3170.93) v1@5127.54,3179.46 ; v1@5120.46,3186.54 ccw(c5111.93,3195.07) 5124,3195.07 ccw(c5136.07,3195.07) v1@5127.54,3186.54 ; 5128.48,2340.48 ccw(c5122.6,2346.36) U1.144@5130.91,2346.36 ; U1.144@5158.88,2375.29 ccw(c5146.52,2387.65) 5164,2387.65 ; U1.144@5161.71,2372.46 ccw(c5156.17,2378) 5164,2378 ; U1.72@5298.35,3489.12 ccw(c5294.37,3493.1) 5300,3493.1 ccw(c5305.63,3493.1) U1.72@5301.65,3489.12 ; U1.72@5300.93,3491.53 ccw(c5304.79,3490.65) U1.72@5302.23,3487.62 ; 5302.39,3497.94 ccw(c5309.57,3496.3) U1.72@5304.81,3490.68 ; 5303.85,3504.35 ccw(c5314.35,3501.95) U1.72@5307.4,3493.73 ; U1.72@5312.12,3501.8 cw(c5317.08,3499.56) 5317.08,3505 ; U1.72@5312.46,3502.29 cw(c5318.99,3495.76) 5318.99,3505 ; U1.72@5315.29,3499.46 cw(c5328.65,3486.1) 5328.65,3505 ; U1.72@5315.76,3500.15 cw(c5323.28,3496.75) 5323.28,3505 ; v1@5348.46,3501.46 ccw(c5339.93,3492.93) 5339.93,3505 ccw(c5339.93,3517.07) v1@5348.46,3508.54 ; v1(5352,3505) 5304,3505 ; U1.62@5439.19,3348.28 5488,3397.08 v1(5488,3570) ; U1.62@5452.84,3364.25 ccw(c5452.84,3369.88) 5456.81,3365.9 ccw(c5460.79,3361.92) U1.62@5455.17,3361.92 ; v1@5484.46,3566.46 cw(c5475.93,3557.93) 5488,3557.93 cw(c5500.07,3557.93) v1@5491.54,3566.46 ; U1.17@5506.74,2596.35 ccw(c5501.11,2596.35) 5505.09,2600.33 ccw(c5509.07,2604.31) U1.17@5509.07,2598.68 ; U？1.33@5510,4005 5561,4005 5582,3984 v1(5582,3912) ; U1.17@5522.71,2582.71 5501,2604.42 5505,2662 5552,2662 5561.7,2671.7 5561.7,2703.16 5530,2734.86 5530,3159 v1(5539,3168) 5578.39,3207.39 U1.52@5578.39,3209.08 5603,3233.7 5603,3421.05 5725,3543.05 ; v1@5534,3168 cw(c5521.93,3168) 5530.46,3159.46 cw(c5539,3150.93) v1@5539,3163 ; U？1.33@5537.12,4002.88 cw(c5542.24,3997.76) 5542.24,4005 cw(c5542.24,4012.24) U？1.33@5537.12,4007.12 ; v1@5539,3173 ccw(c5539,3185.07) 5547.54,3176.54 ccw(c5556.07,3168) v1@5544,3168 ; 5559.57,3188.57 ccw(c5552.69,3195.44) U1.52@5562.42,3195.44 ; v1@5578.46,3915.54 ccw(c5569.93,3924.07) 5582,3924.07 ccw(c5594.07,3924.07) v1@5585.54,3915.54 ; U1.52@5592.03,3225.06 ccw(c5592.03,3230.68) 5596.01,3226.7 ccw(c5599.99,3222.72) U1.52@5594.36,3222.72 ; U1.30@5687.69,2777.3 ccw(c5682.06,2777.3) 5686.04,2781.28 ccw(c5690.02,2785.26) U1.30@5690.02,2779.63 ; v1(5688,3570) v1(5701,3583) 5724,3606 ; v1@5688,3575 ccw(c5688,3587.07) 5696.54,3578.54 ccw(c5705.07,3570) v1@5693,3570 ; v1@5690.31,3574.94 ccw(c5684.49,3585.01) v1@5696.04,3583.6 ; v1@5692.94,3572.31 cw(c5703.01,3566.49) v1@5701.6,3578.04 ; 5694.78,3577.52 cw(c5698.03,3571.9) v1@5699.71,3578.17 ; 5695.52,3576.78 ccw(c5689.9,3580.03) v1@5696.17,3581.71 ; v1@5696,3583 cw(c5683.93,3583) 5692.46,3574.46 cw(c5701,3565.93) v1@5701,3578 ; v1@5701,3588 ccw(c5701,3600.07) 5709.54,3591.54 ccw(c5718.07,3583) v1@5706,3583 ; U1.30@5703.66,2763.66 5679,2788.32 5679,2949 U1.39@5745,3015 ; v1@5721.46,3765.46 cw(c5712.93,3756.93) 5725,3756.93 cw(c5737.07,3756.93) v1@5728.54,3765.46 ; 5725,3605.84 cw(c5757,3605.84) v1@5736.24,3630.19 ; 5725,3614.51 cw(c5749.61,3614.51) v1@5733.65,3633.24 ; 5725,3623.17 cw(c5742.23,3623.17) v1@5731.05,3636.28 ; 5725,3631.83 cw(c5734.85,3631.83) 5728.46,3639.33 ; 5725,3636.41 ccw(c5735.41,3636.41) 5728.05,3629.05 ; 5725,3646.07 ccw(c5745.07,3646.07) v1@5730.88,3631.88 ; 5725,3655.73 ccw(c5754.73,3655.73) v1@5733.71,3634.71 ; 5725,3665.38 ccw(c5764.38,3665.38) 5736.54,3637.54 ccw(c5745.07,3646.07) 5745.07,3634 ccw(c5745.07,3621.93) v1@5736.54,3630.46 ; v1(5725,3769) 5725,3607 ; v1(5733,3634) 5868.99,3634 5896.99,3606 ; v1(5733,4048) 5839.99,4048 C25.2@5867.99,4020 ; v1@5736.54,4044.46 cw(c5745.07,4035.93) 5745.07,4048 cw(c5745.07,4060.07) v1@5736.54,4051.54 ; 5739.66,3009.66 cw(c5745.7,3003.62) U1.39@5745.7,3012.16 ; U1.39@5759.34,3028.13 5813,3081.79 5813,3584 5835,3606 ; U1.39@5772.98,3044.1 ccw(c5772.98,3049.73) 5776.96,3045.75 ccw(c5780.94,3041.77) U1.39@5775.31,3041.77 ; v1(5797,1758) 6056.82,2017.82 6056.82,2131.17 C18.2@5912.99,2275 ; v1@5797,1763 ccw(c5797,1775.07) 5805.54,1766.54 ccw(c5814.07,1758) v1@5802,1758 ; C25.2@5854.24,4020 ccw(c5821.05,4020) 5844.52,4043.47 ccw(c5867.99,4066.94) C25.2@5867.99,4033.75 ; C25.2@5858.24,4020 ccw(c5834.71,4020) 5851.35,4036.64 ccw(c5867.99,4053.28) C25.2@5867.99,4029.75 ; C15.2@5909.24,3580 ccw(c5876.05,3580) 5899.52,3603.47 ccw(c5922.99,3626.94) C15.2@5922.99,3593.75 ; C18.2@5912.99,2261.25 cw(c5912.99,2228.06) 5936.46,2251.53 cw(c5959.93,2275) C18.2@5926.74,2275 ; C18.2@5912.99,2265.25 cw(c5912.99,2241.72) 5929.63,2258.36 cw(c5946.27,2275) C18.2@5922.74,2275 ; C15.2@5913.24,3580 ccw(c5889.71,3580) 5906.35,3596.64 ccw(c5922.99,3613.28) C15.2@5922.99,3589.75 ; C16.2@5923.13,3394.75 ccw(c5923.45,3417.17) 5939.3,3401.31 ccw(c5955.16,3385.46) C16.2@5932.74,3385.14 ; C15.2@5923.13,3570.25 cw(c5923.45,3547.83) 5939.3,3563.69 cw(c5955.16,3579.54) C15.2@5932.74,3579.86 ; C16.2@5923.19,3398.75 ccw(c5923.64,3430.37) 5946,3408.01 ; C15.2@5923.19,3566.25 cw(c5923.64,3534.63) 5946,3556.99 ; C16.2@5929.88,3378.11 cw(c5946.53,3361.47) 5946.53,3385 cw(c5946.53,3408.53) C16.2@5929.88,3391.89 ; C16.2@5932.71,3375.28 cw(c5956.18,3351.81) 5956.18,3385 cw(c5956.18,3418.19) C16.2@5932.71,3394.72 ; C16.2@5936.74,3385.19 cw(c5968.36,3385.64) 5946,3408.01 ; C15.2@5936.74,3579.81 ccw(c5968.36,3579.36) 5946,3556.99 ; C20.2@6139.24,3215 ccw(c6106.05,3215) 6129.52,3238.47 ccw(c6152.99,3261.94) C20.2@6152.99,3228.75 ; C17.2@6143.27,3045.28 cw(c6119.8,3021.81) 6152.99,3021.81 cw(c6186.18,3021.81) C17.2@6162.71,3045.28 ; C17.2@6143.27,3064.72 ccw(c6119.8,3088.19) 6152.99,3088.19 ccw(c6186.18,3088.19) C17.2@6162.71,3064.72 ; C20.2@6143.27,3205.28 cw(c6119.8,3181.81) 6152.99,3181.81 cw(c6186.18,3181.81) C20.2@6162.71,3205.28 ; C20.2@6143.24,3215 ccw(c6119.71,3215) 6136.35,3231.64 ccw(c6152.99,3248.28) C20.2@6152.99,3224.75 ; C17.2@6146.1,3048.11 cw(c6129.46,3031.47) 6152.99,3031.47 cw(c6176.53,3031.47) C17.2@6159.88,3048.11 ; C17.2@6146.1,3061.89 ccw(c6129.46,3078.53) 6152.99,3078.53 ccw(c6176.53,3078.53) C17.2@6159.88,3061.89 ; C20.2@6146.1,3208.11 cw(c6129.46,3191.47) 6152.99,3191.47 cw(c6176.53,3191.47) C20.2@6159.88,3208.11 ; C11.2@6152.99,2905 C17.2@6152.99,3055 C20.2@6152.99,3215 5982.99,3385 C16.2@5922.99,3385 5946,3408.01 ; C22.2@4117.99,2960 4094,2983.99 4094,3131.99 C13.2@4362.01,3400 ; 4227.01,4054.01 4232,4059 4251.01,4059 ; 4227.01,4054.01 C24.2@4227.01,4035 4251.01,4059 ; 4251.01,4059 4416,4059 4432,4059 4449,4042 4449,3784 ; C13.2@4362.01,3400 4386.01,3376 4445,3376 4449,3380 4449,3579.67 ; 4449,3579.67 4449,3784 ; 5303.77,3504 U1.72@5300,3487.47 5300,3500.23 5303.77,3504 ; 5303.77,3504 5304,3505 ; 5303.77,3504 5304,3504.23 5304,3505 ; 5724,3606 5725,3606 ; 5724,3606 5725,3607 ; 5725,3543.05 5725,3606 ; 5725,3543.05 5787.95,3606 ; 5725,3606 5725,3607 ; 5725,3606 5761,3606 ; 5725,3607 5742.5,3624.5 5761,3606 ; 5761,3606 5787.95,3606 ; 5787.95,3606 5835,3606 ; 5835,3606 5896.99,3606 ; 5896.99,3606 C15.2@5922.99,3580 5946,3556.99 ; 5946,3408.01 5946,3556.99
  Bottom Layer w4: v1(4541,3692) 4882,3692 4893,3681 4957,3681 v1(4962,3686) ; v1@4544.54,3688.46 cw(c4553.07,3679.93) 4553.07,3692 cw(c4553.07,3704.07) v1@4544.54,3695.54 ; v1@4627,2640 cw(c4627,2627.93) 4635.54,2636.46 cw(c4644.07,2645) v1@4632,2645 ; v1(4627,2645) 4808,2464 v1(4888,2464) ; v1@4884.46,2460.46 ccw(c4875.93,2451.93) 4875.93,2464 ccw(c4875.93,2476.07) v1@4884.46,2467.54 ; 4937.86,3681 ccw(c4937.86,3710.14) v1@4958.46,3689.54 ; 4947.51,3681 ccw(c4947.51,3700.49) v1@4961.29,3686.71 ; v1@5058,2228 cw(c5058,2215.93) 5066.54,2224.46 cw(c5075.07,2233) v1@5063,2233 ; v1(5058,2233) 5533,1758 v1(5797,1758) ; v1(5124,3183) 5524,3183 v1(5539,3168) ; v1@5127.54,3179.46 cw(c5136.07,3170.93) 5136.07,3183 cw(c5136.07,3195.07) v1@5127.54,3186.54 ; v1(5352,3505) 5356,3505 5400,3549 5479,3549 ; v1@5352,3506 ccw(c5352,3518.07) 5360.54,3509.54 ; v1@5352,3510 ccw(c5352,3531.73) 5367.36,3516.36 ; v1@5483.3,3568.3 cw(c5465.97,3562.03) 5479,3549 ; 5483.45,3553.45 ccw(c5472.51,3564.39) v1@5487.06,3569.66 ; 5487.9,3557.9 ccw(c5479.04,3566.76) v1@5490.82,3571.02 ; v1(5488,3570) 5500,3570 ; v1@5491.55,3566.48 cw(c5500,3558.1) 5500,3570 ; v1@5491.55,3573.52 ccw(c5500,3581.9) 5500,3570 ; 5492.35,3562.35 ccw(c5485.57,3569.12) 5494.58,3572.38 ; v1@5534,3168 ccw(c5521.93,3168) 5530.46,3176.54 ccw(c5539,3185.07) v1@5539,3173 ; v1@5582,3907 cw(c5582,3894.93) 5590.54,3903.46 cw(c5599.07,3912) v1@5587,3912 ; v1(5582,3912) v1(5725,3769) ; v1@5684.46,3566.46 ccw(c5675.93,3557.93) 5675.93,3570 ccw(c5675.93,3582.07) v1@5684.46,3573.54 ; v1(5688,3570) 5500,3570 ; v1@5697.46,3579.46 ccw(c5688.93,3570.93) 5688.93,3583 ccw(c5688.93,3595.07) v1@5697.46,3586.54 ; v1(5701,3583) 5513,3583 5500,3570 ; v1@5720,3769 ccw(c5707.93,3769) 5716.46,3777.54 ccw(c5725,3786.07) v1@5725,3774 ; v1@5721.46,3765.46 cw(c5693.62,3737.62) 5733,3737.62 ; v1@5721.46,3772.54 ccw(c5693.62,3800.38) 5733,3800.38 ; v1@5724.29,3768.29 cw(c5703.27,3747.27) 5733,3747.27 ; v1@5724.29,3769.71 ccw(c5703.27,3790.73) 5733,3790.73 ; v1@5727.12,3766.88 ccw(c5712.93,3781.07) 5733,3781.07 ; v1@5727.12,3771.12 cw(c5712.93,3756.93) 5733,3756.93 ; v1@5729.46,3637.54 ccw(c5720.93,3646.07) 5733,3646.07 ccw(c5745.07,3646.07) v1@5736.54,3637.54 ; v1@5729.46,4044.46 cw(c5720.93,4035.93) 5733,4035.93 cw(c5745.07,4035.93) v1@5736.54,4044.46 ; 5729.95,3764.05 ccw(c5722.59,3771.41) 5733,3771.41 ; 5729.95,3773.95 cw(c5722.59,3766.59) 5733,3766.59 ; v1(5733,3634) v1(5733,4048) ; v1@5793.46,1754.46 ccw(c5784.93,1745.93) 5784.93,1758 ccw(c5784.93,1770.07) v1@5793.46,1761.54 ; 5479,3549 5500,3570
VBUS: P6.1 S1.2 | length 939.3
  Top Layer w4: S1.2@2735,2037 cw(c2735,1969.4) 2782.8,2017.2 cw(c2830.6,2065) S1.2@2763,2065 ; S1.2@2735,2041 cw(c2735,1983.06) 2775.97,2024.03 cw(c2816.94,2065) S1.2@2759,2065 ; S1.2@2735,2045 cw(c2735,1996.72) 2769.14,2030.86 cw(c2803.28,2065) S1.2@2755,2065 ; S1.2@2735,2049 cw(c2735,2010.37) 2762.31,2037.69 cw(c2789.63,2065) S1.2@2751,2065 ; S1.2@2735,2065 2918,1882 2918,1667.99 P6.1@2885.98,1667.99 ; P6.1@2918,1677.61 ccw(c2935.6,1677.61) P6.1@2923.16,1665.16 ; 2918,1687.27 ccw(c2945.26,1687.27) P6.1@2925.98,1667.99 ; 2918,1696.92 ccw(c2954.92,1696.92) P6.1@2928.81,1670.82 ; 2918,1706.58 ccw(c2964.57,1706.58) P6.1@2931.64,1673.65
VCC: R14.2 R15.2 U3.8 | length 765.3
  Top Layer w4: U3.8@3992.36,4775 4160,4775 4179,4756 4179,4696 4174,4691 4116.01,4691 R14.2@4092.01,4715 R15.2@4092.01,4635 ; U3.8@4016.96,4770.4 cw(c4028.05,4759.31) 4028.05,4775 cw(c4028.05,4790.69) U3.8@4016.96,4779.6 ; U3.8@4019.79,4767.58 cw(c4037.71,4749.65) 4037.71,4775 cw(c4037.71,4800.35) U3.8@4019.79,4782.42 ; R15.2@4082.29,4644.72 ccw(c4058.82,4668.19) 4092.01,4668.19 ccw(c4125.2,4668.19) R15.2@4101.73,4644.72 ; R14.2@4082.29,4705.28 cw(c4058.82,4681.81) 4092.01,4681.81 cw(c4125.2,4681.81) R14.2@4101.73,4705.28 ; R15.2@4085.12,4641.89 ccw(c4068.47,4658.53) 4092.01,4658.53 ccw(c4115.54,4658.53) R15.2@4098.9,4641.89 ; R14.2@4085.12,4708.11 cw(c4068.47,4691.47) 4092.01,4691.47 cw(c4115.54,4691.47) R14.2@4098.9,4708.11 ; R14.2@4092.01,4701.25 cw(c4092.01,4668.06) 4115.48,4691.53 cw(c4138.95,4715) R14.2@4105.76,4715 ; R14.2@4092.01,4705.25 cw(c4092.01,4681.72) 4108.65,4698.36 cw(c4125.29,4715) R14.2@4101.76,4715